# Altium PCB PCB1.PcbDoc
Units mm, origin at the board's own origin, x right, y up, seen from the top; angles counter-clockwise.
Board outline 90.04 x 95 mm, 2 copper layers (Top Layer, Bottom Layer); 10 components, 18 nets, 76 pads, 0 vias.
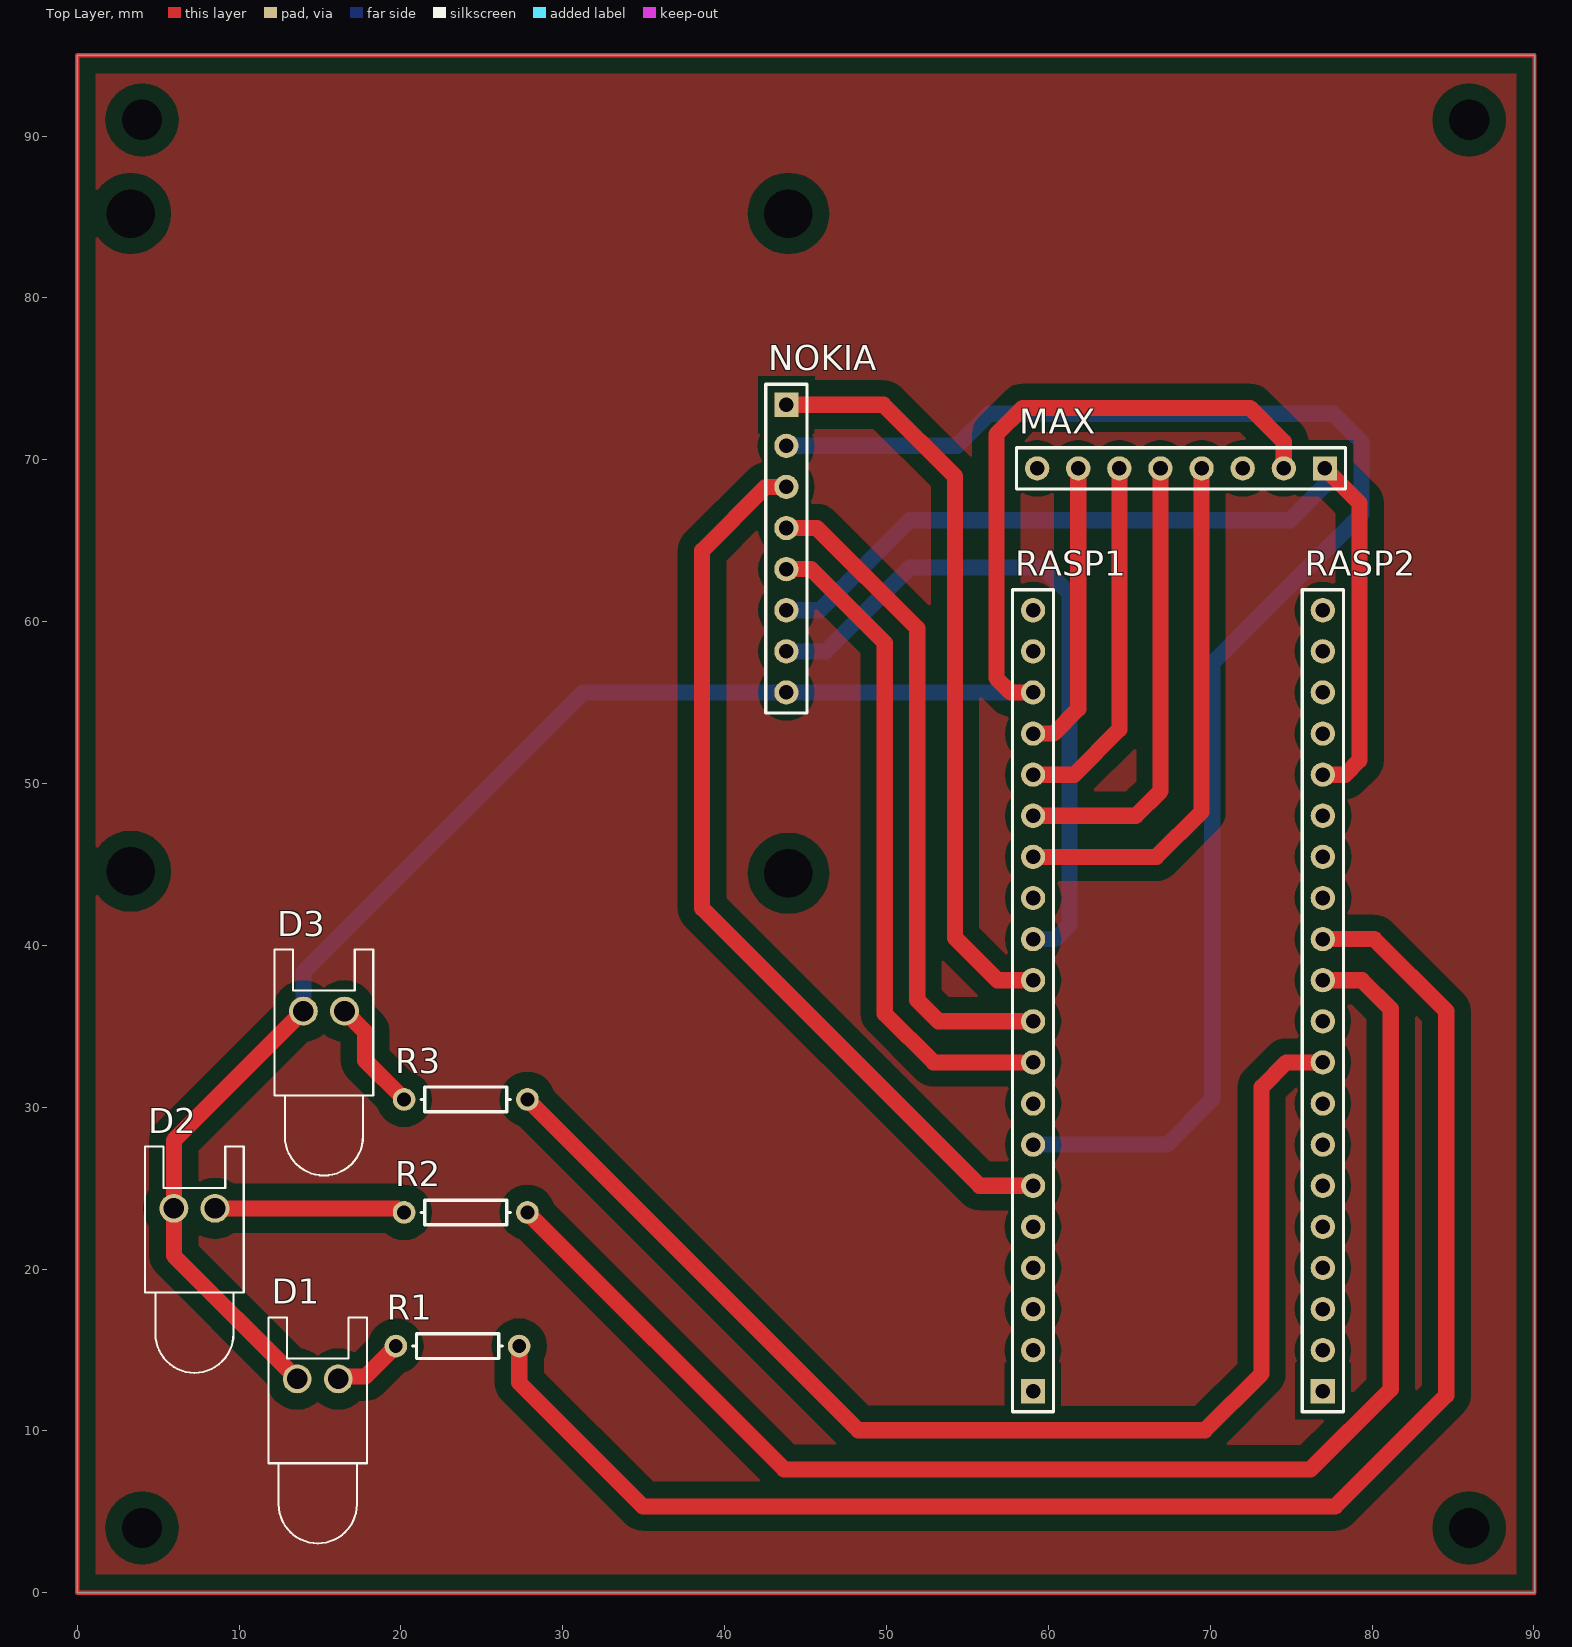
[diagram p0: Top Layer view]
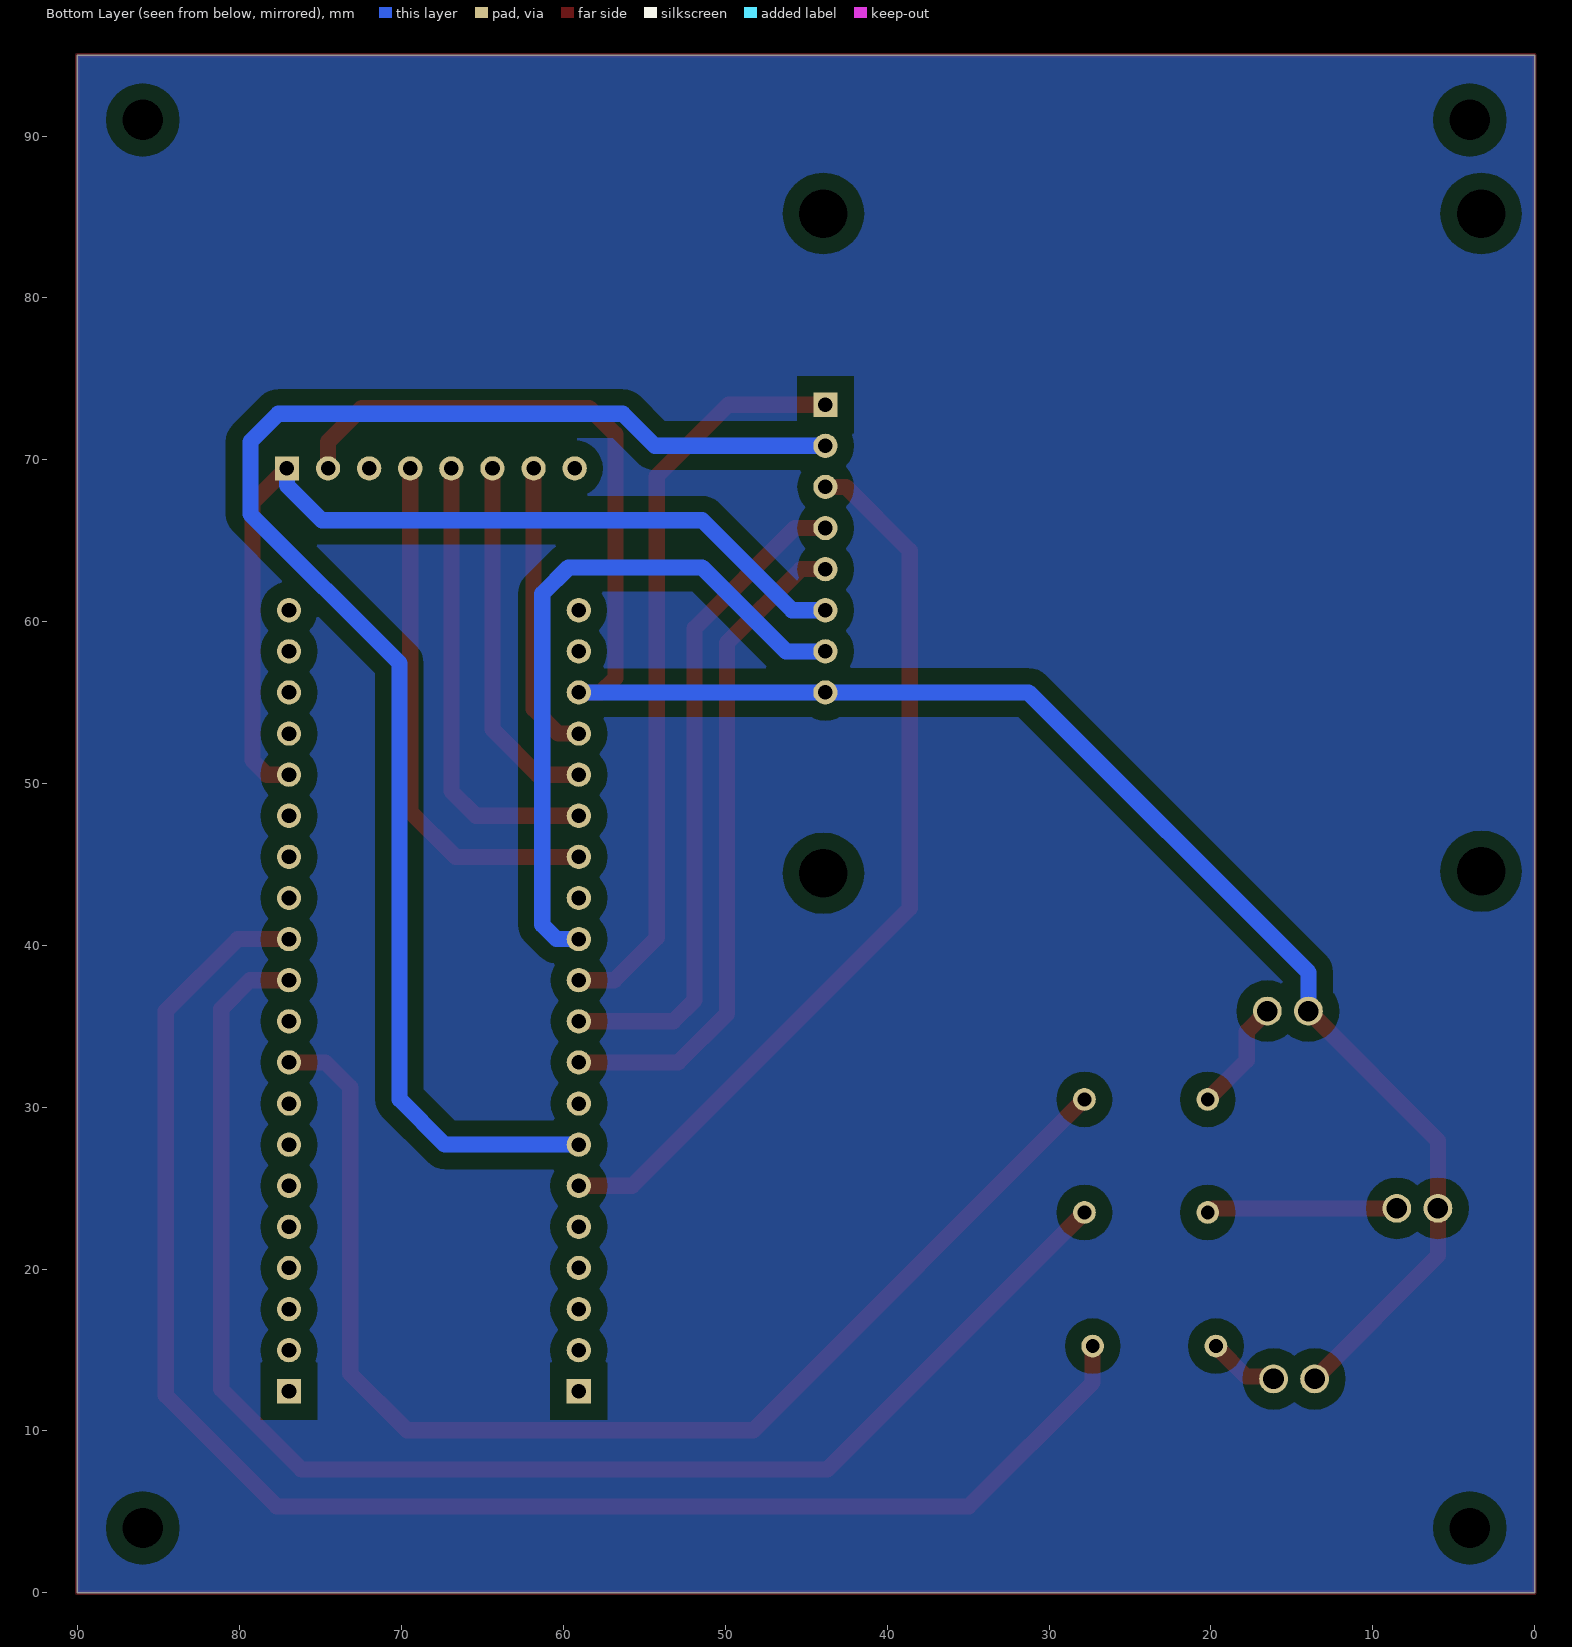
[diagram p1: Bottom Layer view, seen from below]

## Layer stack, top to bottom
Top Solder: solder mask 0.0102, Solder Resist, Dk 3.5
Top Layer: signal copper 0.0356
Dielectric 1: dielectric 0.32, FR-4, Dk 4.8
Bottom Layer: signal copper 0.0356
Bottom Solder: solder mask 0.0102, Solder Resist, Dk 3.5

## Board outline
0,0 90.043,0 90.043,94.996 0,94.996

## Design rules (kind name [scope] priority, off if disabled: settings)
Clearance [All] p1: gap=0.7 ignorepadtopadclearanceinfootprint=FALSE
PolygonConnect [All] p1: connectstyle=Relief reliefconductorwidth=0.254 reliefentries=4 polygonreliefangle="90 Angle" airgapwidth=0.254
RoomDefinition PCB1 [InComponentClass('PCB1')] p1: confinementstyle=ConfineIn formatcopy=TRUE lockcomponents=FALSE outline 0,0 90.043,0 90.043,94.996 0,94.996
RoutingVias [All] p1: holewidth=0.711 width=1.27 viastyle="Through Hole" minholewidth=0.711 minwidth=1.27 maxholewidth=0.711 maxwidth=1.27
SolderMaskExpansion [All] p1: expansion=0.102
Width [All] p1: maxlimit=1.2 minlimit=1 preferedwidth=1 bottomlayer_maxwidth=1 minimp=50.000000 maximp=50.000000 favimp=50.000000
30 further rules are at their usual default settings.

## Classes and differential pairs
component class PCB1: D1 D3 MAX NOKIA R1 R2 R3 RASP1

## Components (designator, comment, footprint, x,y, rotation, side; value= is the part's Value field where it differs from the comment)
D1 "LED0" LED-0 14.859,13.208 r0 top
D2 "LED0" LED-0 7.239,23.749 r0 top
D3 "LED0" LED-0 15.24,35.941 r0 top
MAX "Header 8" HDR1X8 77.089,69.469 r180 top
NOKIA "Header 8" HDR1X8 43.815,73.406 r270 top
R1 "Res1" AXIAL-0.3 23.495,15.24 r180 top value=220
R2 "Res1" AXIAL-0.3 24.003,23.495 r180 top value=220
R3 "Res1" AXIAL-0.3 24.003,30.48 r180 top value=220
RASP1 "Header 20" HDR1X20 59.055,12.446 r90 top
RASP2 "Header 20" HDR1X20 76.962,12.446 r90 top

## Footprints (in the part's own frame and the unit in brackets; to place one, negate y for a bottom-side part, rotate by r counter-clockwise, add the part's x,y. Pads: shape width x height; smd on the part's side, far side on the other; paste and mask are expansions set on the pad)
AXIAL-0.3 [mm] "Axial Device, Thru-Hole; 2 Leads; 0.3 in Pin Spacing"
  round 1.4 hole 0.85: 1(-3.81,0) 2(3.81,0)
  silkscreen extent -2.77,-0.76 2.77,0.76
HDR1X8 [mm] "Connector; Header; 8 Position"
  rect 1.5x1.5 hole 0.9: 1(0,0)
  round 1.5 hole 0.9: 2(2.54,0) 3(5.08,0) 4(7.62,0) 5(10.16,0) 6(12.7,0) 7(15.24,0) 8(17.78,0)
  silkscreen extent -1.27,-1.27 19.05,1.27
HDR1X20 [mm] "Connector; Header; 20 Position"
  rect 1.5x1.5 hole 0.9: 1(0,0)
  round 1.5 hole 0.9: 2(2.54,0) 3(5.08,0) 4(7.62,0) 5(10.16,0) 6(12.7,0) 7(15.24,0) 8(17.78,0) 9(20.32,0) 10(22.86,0) 11(25.4,0) 12(27.94,0) 13(30.48,0) 14(33.02,0) 15(35.56,0) 16(38.1,0) 17(40.64,0) 18(43.18,0) 19(45.72,0) 20(48.26,0)
  silkscreen extent -1.27,-1.27 49.53,1.27
LED-0 [mil] "LED; 2 Leads"
  round 70 hole 50: 1(50,0) 2(-50,0)
  silkscreen extent -120,-400 120,150

## Part data
D1 D2 D3: "Typical INFRARED GaAs LED", LatestRevisionDate=08-Jul-2005, LatestRevisionNote="Mech Layer 1 removed.", PackageDescription="LED; 2 Leads", PackageReference=LED-0, Published=8-Jun-2000, Publisher="Altium Limited"
MAX NOKIA: "Header, 8-Pin", LatestRevisionDate=17-Jul-2002, LatestRevisionNote="Re-released for DXP Platform.", Publisher="Altium Limited"
R1 R2 R3: "Resistor", LatestRevisionDate=17-Jul-2002, LatestRevisionNote="Re-released for DXP Platform.", PackageDescription="Axial Device, Thru-Hole; 2 Leads; 0.3 in Pin Spacing", PackageReference=AXIAL-0.3, Published=8-Jun-2000, Publisher="Altium Limited"
RASP1 RASP2: "Header, 20-Pin", LatestRevisionDate=17-Jul-2002, LatestRevisionNote="Re-released for DXP Platform.", Publisher="Altium Limited"

## Free pads (board coordinates)
  round 1.524 hole 2.5: 3(4,4) 3(4,91) 3(86,4) 3(86,91)
  round 1.524 hole 3: 4(3.302,44.577) 4(3.302,85.217) 4(43.942,44.45) 4(43.942,85.217)

## Nets (pads, with @x,y where several pads share a name; then routed paths per layer and width w, separated by ;. In a path a pad name is that pad's centre, name@x,y a point inside that pad or via, vN(x,y) a via of type N, cw(c..) or ccw(c..) an arc to the next point about the centre after c; other vN are vias at no path point)
NetD1_1: D1.1 R1.2 | length 4.4
  Top Layer w1: D1.1 16.278,13.357 17.802,13.357 R1.2
NetD1_2: D1.2 D2.2 D3.2 MAX.2 NOKIA.8 RASP1.18 | length 122.5
  Top Layer w1: D1.2 5.969,20.828 D2.2 5.969,27.94 D3.2 ; RASP1.18 57.683,55.626 56.794,56.515 56.794,71.577 58.42,73.203 72.466,73.203 74.549,71.12 MAX.2
  Bottom Layer w1: D3.2 13.97,38.329 31.267,55.626 NOKIA.8 RASP1.18
NetD2_1: D2.1 R2.2 | length 11.8
  Top Layer w1: D2.1 19.831,23.749 20.085,23.495 R2.2
NetD3_1: D3.1 R3.2 | length 7
  Top Layer w1: D3.1 17.78,34.671 17.78,32.893 R3.2
NetMAX_1: MAX.1 NOKIA.6 RASP2.16 | length 59.1
  Top Layer w1: RASP2.16 78.334,50.546 79.223,51.435 79.223,67.335 MAX.1
  Bottom Layer w1: NOKIA.6 45.872,60.706 51.435,66.269 74.93,66.269 77.089,68.428 MAX.1
NetMAX_4: MAX.4 RASP1.14 | length 32.8
  Top Layer w1: RASP1.14 66.675,45.466 69.469,48.26 MAX.4
NetMAX_5: MAX.5 RASP1.15 | length 28.4
  Top Layer w1: RASP1.15 65.405,48.006 66.929,49.53 MAX.5
NetMAX_6: MAX.6 RASP1.16 | length 22.6
  Top Layer w1: RASP1.16 61.595,50.546 64.389,53.34 MAX.6
NetMAX_7: MAX.7 RASP1.17 | length 18.3
  Top Layer w1: RASP1.17 60.325,53.086 61.849,54.61 MAX.7
NetNOKIA_1: NOKIA.1 RASP1.11 | length 46.7
  Top Layer w1: NOKIA.1 49.809,73.406 54.235,68.98 54.235,40.471 56.86,37.846 RASP1.11
NetNOKIA_2: NOKIA.2 RASP1.7 | length 93.8
  Bottom Layer w1: NOKIA.2 54.356,70.866 56.337,72.847 77.622,72.847 79.35,71.12 79.35,66.65 70.129,57.429 70.129,30.48 67.335,27.686 RASP1.7
NetNOKIA_3: NOKIA.3 RASP1.6 | length 56.5
  Top Layer w1: NOKIA.3 42.545,68.326 38.608,64.389 38.608,42.291 55.753,25.146 RASP1.6
NetNOKIA_4: NOKIA.4 RASP1.10 | length 41.3
  Top Layer w1: NOKIA.4 45.7,65.786 51.897,59.588 51.897,36.622 53.213,35.306 RASP1.10
NetNOKIA_5: NOKIA.5 RASP1.9 | length 41.3
  Top Layer w1: NOKIA.5 45.339,63.246 49.897,58.688 49.897,35.777 52.908,32.766 RASP1.9
NetNOKIA_7: NOKIA.7 RASP1.12 | length 43.4
  Bottom Layer w1: NOKIA.7 46.253,58.166 51.435,63.348 59.69,63.348 61.316,61.722 61.316,41.275 60.427,40.386 RASP1.12
NetR1_1: R1.1 RASP2.12 | length 98.8
  Top Layer w1: R1.1 27.305,12.979 34.95,5.334 77.724,5.334 84.582,12.192 84.582,35.941 80.137,40.386 RASP2.12
NetR2_1: R2.1 RASP2.11 | length 90.4
  Top Layer w1: R2.1 43.688,7.62 76.2,7.62 81.153,12.573 81.153,36.068 79.375,37.846 RASP2.11
NetR3_1: R3.1 RASP2.9 | length 77.4
  Top Layer w1: R3.1 48.26,10.033 69.672,10.033 73.177,13.538 73.177,31.231 74.712,32.766 RASP2.9
pads on no net: MAX.3 MAX.8 RASP1.1 RASP1.2 RASP1.3 RASP1.4 RASP1.5 RASP1.8 RASP1.13 RASP1.19 RASP1.20 RASP2.1 RASP2.2 RASP2.3 RASP2.4 RASP2.5 RASP2.6 RASP2.7 RASP2.8 RASP2.10 RASP2.13 RASP2.14 RASP2.15 RASP2.17 RASP2.18 RASP2.19 RASP2.20
copper on no net: | length 370.1
  Top Layer w0.254: 0,0 90.043,0 90.043,94.996 0,94.996 0,0

## Polygon pours and split planes (outlines as drawn)
no net on Top Layer "Top Layer-No Net" (solid, pour order 16): 0,94.996 90.043,94.996 90.043,0 0,0
no net on Top Layer "Top Layer-No Net 1" (solid, pour order 4): 132.08,0
no net on Bottom Layer "Bottom Layer-No Net" (solid, pour order 18): 0,94.996 0,0 90.043,0 90.043,94.996